# Altium PCB Peak Detector With Banking.PcbDoc (part 3 of 5)
Units mil, origin at the board's own origin, x right, y up, seen from the top; angles counter-clockwise.
Board outline 3330 x 2725 mil, 4 copper layers (TopLayer, GROUND, MidLayer1, BottomLayer); 549 components, 391 nets, 1594 pads, 460 vias.
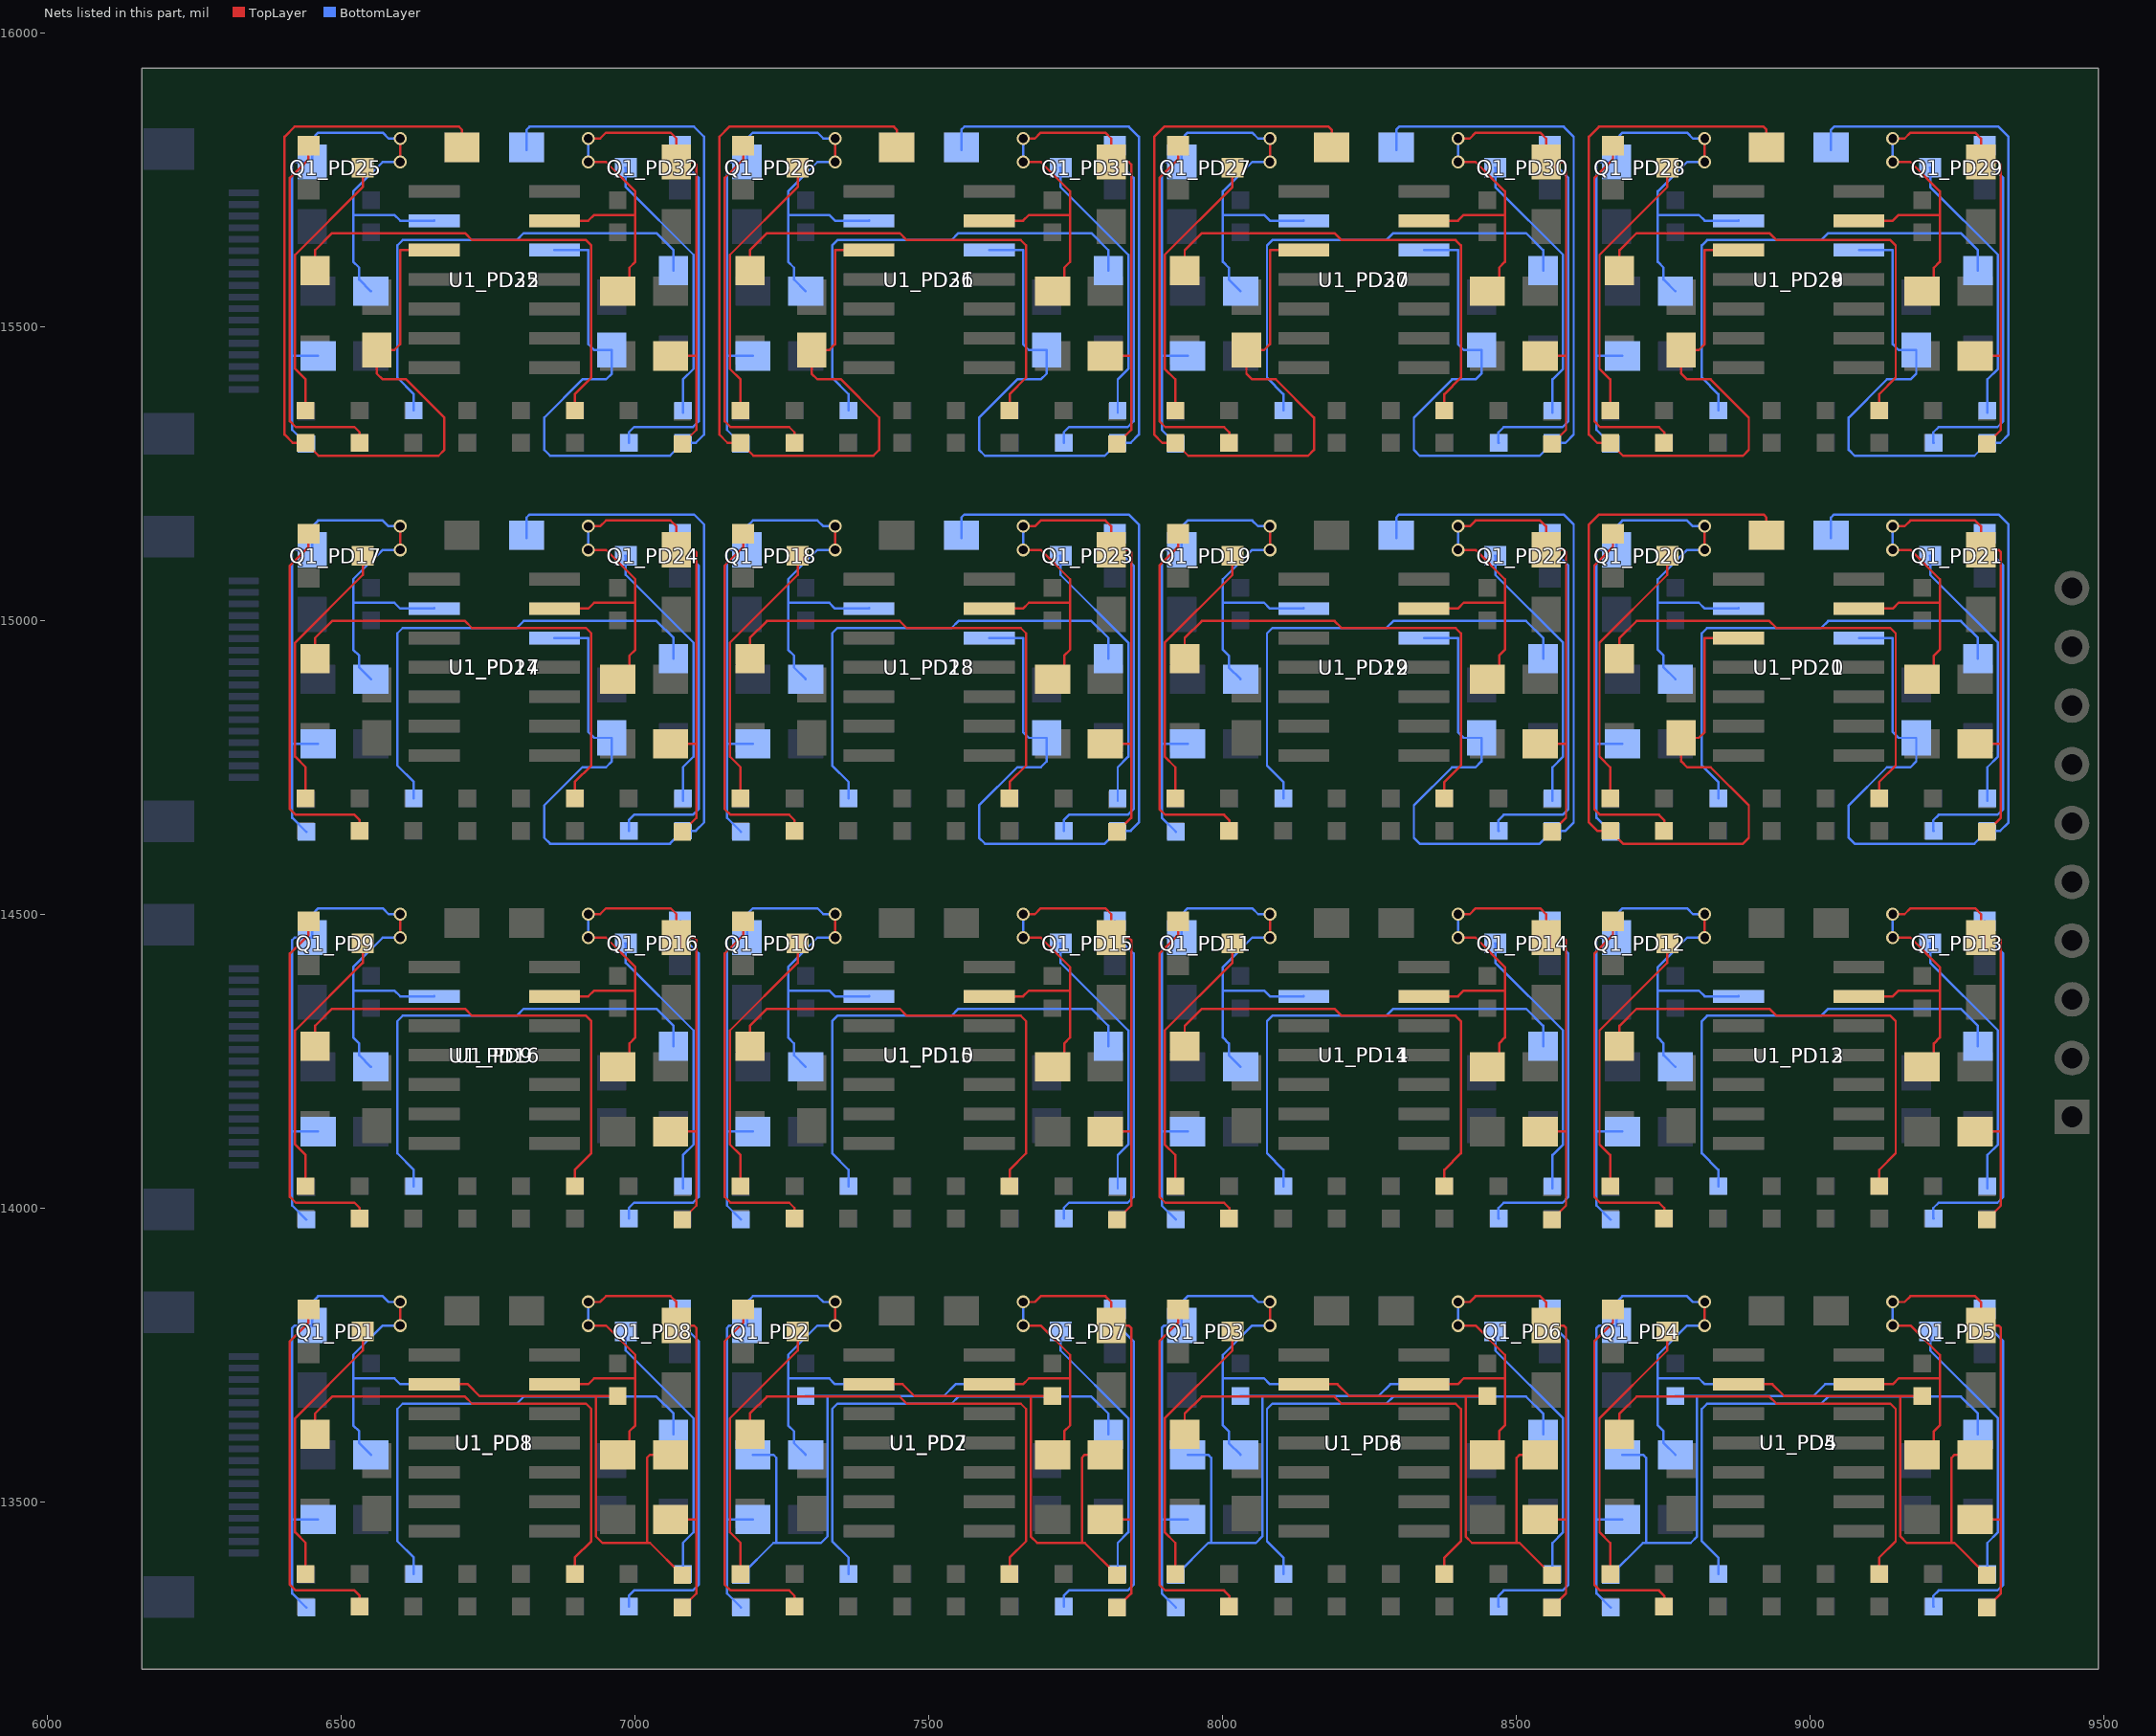
[diagram p5: the nets of this part, all layers, seen from the top]

## Via types
v1: diameter 22, hole 15, TopLayer to BottomLayer, 432 vias
v2: diameter 22, hole 16, TopLayer to BottomLayer, 28 vias

## Nets (pads, with @x,y where several pads share a name; then routed paths per layer and width w, separated by ;. In a path a pad name is that pad's centre, name@x,y a point inside that pad or via, vN(x,y) a via of type N, cw(c..) or ccw(c..) an arc to the next point about the centre after c; other vN are vias at no path point) (continued)
N6_PD20: C6_PD20.2 D1_PD20.2 R5_PD20.1 U1_PD20.10 | length 1647
  TopLayer w4: U1_PD20.10@8877.63,14970 8820,14970 8820,14810 8810,14800 C6_PD20.2@8780,14799.99 8780,14760 8790,14750 8830,14750 8895,14685 8895,14630 8885,14620 8681,14620 R5_PD20.1@8659,14642 8637,14642 8623,14656 8623,15163 8640,15180 8920,15180 8925.01,15174.99 D1_PD20.2@8925.01,15145 D1_PD20.2@8925.01,15140
N6_PD21: C6_PD21.2 D1_PD21.2 R5_PD21.1 U1_PD21.10 | length 1647
  BottomLayer w4: D1_PD21.2@9034.99,15140 D1_PD21.2@9034.99,15145 9034.99,15174.99 9040,15180 9320,15180 9337,15163 9337,14656 9323,14642 R5_PD21.1@9301,14642 9279,14620 9075,14620 9065,14630 9065,14685 9130,14750 9170,14750 9180,14760 C6_PD21.2@9180,14799.99 9150,14800 9140,14810 9140,14970 U1_PD21.10@9082.37,14970
N6_PD22: C6_PD22.2 D1_PD22.2 R5_PD22.1 U1_PD22.10 | length 1647
  BottomLayer w4: D1_PD22.2@8294.99,15140 D1_PD22.2@8294.99,15145 8294.99,15174.99 8300,15180 8580,15180 8597,15163 8597,14656 8583,14642 R5_PD22.1@8561,14642 8539,14620 8335,14620 8325,14630 8325,14685 8390,14750 8430,14750 8440,14760 C6_PD22.2@8440,14799.99 8410,14800 8400,14810 8400,14970 U1_PD22.10@8342.37,14970
N6_PD23: C6_PD23.2 D1_PD23.2 R5_PD23.1 U1_PD23.10 | length 1647
  BottomLayer w4: D1_PD23.2@7554.99,15140 D1_PD23.2@7554.99,15145 7554.99,15174.99 7560,15180 7840,15180 7857,15163 7857,14656 7843,14642 R5_PD23.1@7821,14642 7799,14620 7595,14620 7585,14630 7585,14685 7650,14750 7690,14750 7700,14760 C6_PD23.2@7700,14799.99 7670,14800 7660,14810 7660,14970 U1_PD23.10@7602.37,14970
N6_PD24: C6_PD24.2 D1_PD24.2 R5_PD24.1 U1_PD24.10 | length 1647
  BottomLayer w4: D1_PD24.2@6814.99,15140 D1_PD24.2@6814.99,15145 6814.99,15174.99 6820,15180 7100,15180 7117,15163 7117,14656 7103,14642 R5_PD24.1@7081,14642 7059,14620 6855,14620 6845,14630 6845,14685 6910,14750 6950,14750 6960,14760 C6_PD24.2@6960,14799.99 6930,14800 6920,14810 6920,14970 U1_PD24.10@6862.37,14970
N6_PD25: C6_PD25.2 D1_PD25.2 R5_PD25.1 U1_PD25.10 | length 1647
  TopLayer w4: U1_PD25.10@6657.63,15630 6600,15630 6600,15470 6590,15460 C6_PD25.2@6560,15459.99 6560,15420 6570,15410 6610,15410 6675,15345 6675,15290 6665,15280 6461,15280 R5_PD25.1@6439,15302 6417,15302 6403,15316 6403,15823 6420,15840 6700,15840 6705.01,15834.99 D1_PD25.2@6705.01,15805 D1_PD25.2@6705.01,15800
N6_PD26: C6_PD26.2 D1_PD26.2 R5_PD26.1 U1_PD26.10 | length 1647
  TopLayer w4: U1_PD26.10@7397.63,15630 7340,15630 7340,15470 7330,15460 C6_PD26.2@7300,15459.99 7300,15420 7310,15410 7350,15410 7415,15345 7415,15290 7405,15280 7201,15280 R5_PD26.1@7179,15302 7157,15302 7143,15316 7143,15823 7160,15840 7440,15840 7445.01,15834.99 D1_PD26.2@7445.01,15805 D1_PD26.2@7445.01,15800
N6_PD27: C6_PD27.2 D1_PD27.2 R5_PD27.1 U1_PD27.10 | length 1647
  TopLayer w4: U1_PD27.10@8137.63,15630 8080,15630 8080,15470 8070,15460 C6_PD27.2@8040,15459.99 8040,15420 8050,15410 8090,15410 8155,15345 8155,15290 8145,15280 7941,15280 R5_PD27.1@7919,15302 7897,15302 7883,15316 7883,15823 7900,15840 8180,15840 8185.01,15834.99 D1_PD27.2@8185.01,15805 D1_PD27.2@8185.01,15800
N6_PD28: C6_PD28.2 D1_PD28.2 R5_PD28.1 U1_PD28.10 | length 1647
  TopLayer w4: U1_PD28.10@8877.63,15630 8820,15630 8820,15470 8810,15460 C6_PD28.2@8780,15459.99 8780,15420 8790,15410 8830,15410 8895,15345 8895,15290 8885,15280 8681,15280 R5_PD28.1@8659,15302 8637,15302 8623,15316 8623,15823 8640,15840 8920,15840 8925.01,15834.99 D1_PD28.2@8925.01,15805 D1_PD28.2@8925.01,15800
N6_PD29: C6_PD29.2 D1_PD29.2 R5_PD29.1 U1_PD29.10 | length 1647
  BottomLayer w4: D1_PD29.2@9034.99,15800 D1_PD29.2@9034.99,15805 9034.99,15834.99 9040,15840 9320,15840 9337,15823 9337,15316 9323,15302 R5_PD29.1@9301,15302 9279,15280 9075,15280 9065,15290 9065,15345 9130,15410 9170,15410 9180,15420 C6_PD29.2@9180,15459.99 9150,15460 9140,15470 9140,15630 U1_PD29.10@9082.37,15630
N6_PD30: C6_PD30.2 D1_PD30.2 R5_PD30.1 U1_PD30.10 | length 1647
  BottomLayer w4: D1_PD30.2@8294.99,15800 D1_PD30.2@8294.99,15805 8294.99,15834.99 8300,15840 8580,15840 8597,15823 8597,15316 8583,15302 R5_PD30.1@8561,15302 8539,15280 8335,15280 8325,15290 8325,15345 8390,15410 8430,15410 8440,15420 C6_PD30.2@8440,15459.99 8410,15460 8400,15470 8400,15630 U1_PD30.10@8342.37,15630
N6_PD31: C6_PD31.2 D1_PD31.2 R5_PD31.1 U1_PD31.10 | length 1647
  BottomLayer w4: D1_PD31.2@7554.99,15800 D1_PD31.2@7554.99,15805 7554.99,15834.99 7560,15840 7840,15840 7857,15823 7857,15316 7843,15302 R5_PD31.1@7821,15302 7799,15280 7595,15280 7585,15290 7585,15345 7650,15410 7690,15410 7700,15420 C6_PD31.2@7700,15459.99 7670,15460 7660,15470 7660,15630 U1_PD31.10@7602.37,15630
N6_PD32: C6_PD32.2 D1_PD32.2 R5_PD32.1 U1_PD32.10 | length 1647
  BottomLayer w4: D1_PD32.2@6814.99,15800 D1_PD32.2@6814.99,15805 6814.99,15834.99 6820,15840 7100,15840 7117,15823 7117,15316 7103,15302 R5_PD32.1@7081,15302 7059,15280 6855,15280 6845,15290 6845,15345 6910,15410 6950,15410 6960,15420 C6_PD32.2@6960,15459.99 6930,15460 6920,15470 6920,15630 U1_PD32.10@6862.37,15630
N7_PD1: Q1_PD1.2 R4_PD1.2 | length 626.9
  TopLayer w4: Q1_PD1.2@6443.74,13827.4 6443.74,13804.74 6412,13773 6412,13359 6422,13349 6522,13349 6531,13340 6531,13321.99 R4_PD1.2@6530.57,13321.99
N7_PD2: Q1_PD2.2 R4_PD2.2 | length 626.9
  TopLayer w4: Q1_PD2.2@7183.74,13827.4 7183.74,13804.74 7152,13773 7152,13359 7162,13349 7262,13349 7271,13340 7271,13321.99 R4_PD2.2@7270.57,13321.99
N7_PD3: Q1_PD3.2 R4_PD3.2 | length 626.9
  TopLayer w4: Q1_PD3.2@7923.74,13827.4 7923.74,13804.74 7892,13773 7892,13359 7902,13349 8002,13349 8011,13340 8011,13321.99 R4_PD3.2@8010.57,13321.99
N7_PD4: Q1_PD4.2 R4_PD4.2 | length 626.9
  TopLayer w4: Q1_PD4.2@8663.74,13827.4 8663.74,13804.74 8632,13773 8632,13359 8642,13349 8742,13349 8751,13340 8751,13321.99 R4_PD4.2@8750.57,13321.99
N7_PD5: Q1_PD5.2 R4_PD5.2 | length 626.9
  BottomLayer w4: R4_PD5.2@9209.43,13321.99 9209,13321.99 9209,13340 9218,13349 9318,13349 9328,13359 9328,13773 9296.26,13804.74 Q1_PD5.2@9296.26,13827.4
N7_PD6: Q1_PD6.2 R4_PD6.2 | length 626.9
  BottomLayer w4: R4_PD6.2@8469.43,13321.99 8469,13321.99 8469,13340 8478,13349 8578,13349 8588,13359 8588,13773 8556.26,13804.74 Q1_PD6.2@8556.26,13827.4
N7_PD7: Q1_PD7.2 R4_PD7.2 | length 626.9
  BottomLayer w4: R4_PD7.2@7729.43,13321.99 7729,13321.99 7729,13340 7738,13349 7838,13349 7848,13359 7848,13773 7816.26,13804.74 Q1_PD7.2@7816.26,13827.4
N7_PD8: Q1_PD8.2 R4_PD8.2 | length 626.9
  BottomLayer w4: R4_PD8.2@6989.43,13321.99 6989,13321.99 6989,13340 6998,13349 7098,13349 7108,13359 7108,13773 7076.26,13804.74 Q1_PD8.2@7076.26,13827.4
N7_PD9: Q1_PD9.2 R4_PD9.2 | length 626.9
  TopLayer w4: Q1_PD9.2@6443.74,14487.4 6443.74,14464.74 6412,14433 6412,14019 6422,14009 6522,14009 6531,14000 6531,13981.99 R4_PD9.2@6530.57,13981.99
N7_PD10: Q1_PD10.2 R4_PD10.2 | length 626.9
  TopLayer w4: Q1_PD10.2@7183.74,14487.4 7183.74,14464.74 7152,14433 7152,14019 7162,14009 7262,14009 7271,14000 7271,13981.99 R4_PD10.2@7270.57,13981.99
N7_PD11: Q1_PD11.2 R4_PD11.2 | length 626.9
  TopLayer w4: Q1_PD11.2@7923.74,14487.4 7923.74,14464.74 7892,14433 7892,14019 7902,14009 8002,14009 8011,14000 8011,13981.99 R4_PD11.2@8010.57,13981.99
N7_PD12: Q1_PD12.2 R4_PD12.2 | length 626.9
  TopLayer w4: Q1_PD12.2@8663.74,14487.4 8663.74,14464.74 8632,14433 8632,14019 8642,14009 8742,14009 8751,14000 8751,13981.99 R4_PD12.2@8750.57,13981.99
N7_PD13: Q1_PD13.2 R4_PD13.2 | length 626.9
  BottomLayer w4: R4_PD13.2@9209.43,13981.99 9209,13981.99 9209,14000 9218,14009 9318,14009 9328,14019 9328,14433 9296.26,14464.74 Q1_PD13.2@9296.26,14487.4
N7_PD14: Q1_PD14.2 R4_PD14.2 | length 626.9
  BottomLayer w4: R4_PD14.2@8469.43,13981.99 8469,13981.99 8469,14000 8478,14009 8578,14009 8588,14019 8588,14433 8556.26,14464.74 Q1_PD14.2@8556.26,14487.4
N7_PD15: Q1_PD15.2 R4_PD15.2 | length 626.9
  BottomLayer w4: R4_PD15.2@7729.43,13981.99 7729,13981.99 7729,14000 7738,14009 7838,14009 7848,14019 7848,14433 7816.26,14464.74 Q1_PD15.2@7816.26,14487.4
N7_PD16: Q1_PD16.2 R4_PD16.2 | length 626.9
  BottomLayer w4: R4_PD16.2@6989.43,13981.99 6989,13981.99 6989,14000 6998,14009 7098,14009 7108,14019 7108,14433 7076.26,14464.74 Q1_PD16.2@7076.26,14487.4
N7_PD17: Q1_PD17.2 R4_PD17.2 | length 626.9
  TopLayer w4: Q1_PD17.2@6443.74,15147.4 6443.74,15124.74 6412,15093 6412,14679 6422,14669 6522,14669 6531,14660 6531,14641.99 R4_PD17.2@6530.57,14641.99
N7_PD18: Q1_PD18.2 R4_PD18.2 | length 626.9
  TopLayer w4: Q1_PD18.2@7183.74,15147.4 7183.74,15124.74 7152,15093 7152,14679 7162,14669 7262,14669 7271,14660 7271,14641.99 R4_PD18.2@7270.57,14641.99
N7_PD19: Q1_PD19.2 R4_PD19.2 | length 626.9
  TopLayer w4: Q1_PD19.2@7923.74,15147.4 7923.74,15124.74 7892,15093 7892,14679 7902,14669 8002,14669 8011,14660 8011,14641.99 R4_PD19.2@8010.57,14641.99
N7_PD20: Q1_PD20.2 R4_PD20.2 | length 626.9
  TopLayer w4: Q1_PD20.2@8663.74,15147.4 8663.74,15124.74 8632,15093 8632,14679 8642,14669 8742,14669 8751,14660 8751,14641.99 R4_PD20.2@8750.57,14641.99
N7_PD21: Q1_PD21.2 R4_PD21.2 | length 626.9
  BottomLayer w4: R4_PD21.2@9209.43,14641.99 9209,14641.99 9209,14660 9218,14669 9318,14669 9328,14679 9328,15093 9296.26,15124.74 Q1_PD21.2@9296.26,15147.4
N7_PD22: Q1_PD22.2 R4_PD22.2 | length 626.9
  BottomLayer w4: R4_PD22.2@8469.43,14641.99 8469,14641.99 8469,14660 8478,14669 8578,14669 8588,14679 8588,15093 8556.26,15124.74 Q1_PD22.2@8556.26,15147.4
N7_PD23: Q1_PD23.2 R4_PD23.2 | length 626.9
  BottomLayer w4: R4_PD23.2@7729.43,14641.99 7729,14641.99 7729,14660 7738,14669 7838,14669 7848,14679 7848,15093 7816.26,15124.74 Q1_PD23.2@7816.26,15147.4
N7_PD24: Q1_PD24.2 R4_PD24.2 | length 626.9
  BottomLayer w4: R4_PD24.2@6989.43,14641.99 6989,14641.99 6989,14660 6998,14669 7098,14669 7108,14679 7108,15093 7076.26,15124.74 Q1_PD24.2@7076.26,15147.4
N7_PD25: Q1_PD25.2 R4_PD25.2 | length 626.9
  TopLayer w4: Q1_PD25.2@6443.74,15807.4 6443.74,15784.74 6412,15753 6412,15339 6422,15329 6522,15329 6531,15320 6531,15301.99 R4_PD25.2@6530.57,15301.99
N7_PD26: Q1_PD26.2 R4_PD26.2 | length 626.9
  TopLayer w4: Q1_PD26.2@7183.74,15807.4 7183.74,15784.74 7152,15753 7152,15339 7162,15329 7262,15329 7271,15320 7271,15301.99 R4_PD26.2@7270.57,15301.99
N7_PD27: Q1_PD27.2 R4_PD27.2 | length 626.9
  TopLayer w4: Q1_PD27.2@7923.74,15807.4 7923.74,15784.74 7892,15753 7892,15339 7902,15329 8002,15329 8011,15320 8011,15301.99 R4_PD27.2@8010.57,15301.99
N7_PD28: Q1_PD28.2 R4_PD28.2 | length 626.9
  TopLayer w4: Q1_PD28.2@8663.74,15807.4 8663.74,15784.74 8632,15753 8632,15339 8642,15329 8742,15329 8751,15320 8751,15301.99 R4_PD28.2@8750.57,15301.99
N7_PD29: Q1_PD29.2 R4_PD29.2 | length 626.9
  BottomLayer w4: R4_PD29.2@9209.43,15301.99 9209,15301.99 9209,15320 9218,15329 9318,15329 9328,15339 9328,15753 9296.26,15784.74 Q1_PD29.2@9296.26,15807.4
N7_PD30: Q1_PD30.2 R4_PD30.2 | length 626.9
  BottomLayer w4: R4_PD30.2@8469.43,15301.99 8469,15301.99 8469,15320 8478,15329 8578,15329 8588,15339 8588,15753 8556.26,15784.74 Q1_PD30.2@8556.26,15807.4
N7_PD31: Q1_PD31.2 R4_PD31.2 | length 626.9
  BottomLayer w4: R4_PD31.2@7729.43,15301.99 7729,15301.99 7729,15320 7738,15329 7838,15329 7848,15339 7848,15753 7816.26,15784.74 Q1_PD31.2@7816.26,15807.4
N7_PD32: Q1_PD32.2 R4_PD32.2 | length 626.9
  BottomLayer w4: R4_PD32.2@6989.43,15301.99 6989,15301.99 6989,15320 6998,15329 7098,15329 7108,15339 7108,15753 7076.26,15784.74 Q1_PD32.2@7076.26,15807.4
N8_PD1: Q1_PD1.1 R5_PD1.2 | length 472.9
  TopLayer w4: R5_PD1.2@6439,13373 R5_PD1.2@6439,13377 6439,13430 6421,13448 6421,13642 6536.26,13757.26 Q1_PD1.1@6536.26,13790 Q1_PD1.1@6537,13790
N8_PD2: Q1_PD2.1 R5_PD2.2 | length 472.9
  TopLayer w4: R5_PD2.2@7179,13373 R5_PD2.2@7179,13377 7179,13430 7161,13448 7161,13642 7276.26,13757.26 Q1_PD2.1@7276.26,13790 Q1_PD2.1@7277,13790
N8_PD3: Q1_PD3.1 R5_PD3.2 | length 472.9
  TopLayer w4: R5_PD3.2@7919,13373 R5_PD3.2@7919,13377 7919,13430 7901,13448 7901,13642 8016.26,13757.26 Q1_PD3.1@8016.26,13790 Q1_PD3.1@8017,13790
N8_PD4: Q1_PD4.1 R5_PD4.2 | length 472.9
  TopLayer w4: R5_PD4.2@8659,13373 R5_PD4.2@8659,13377 8659,13430 8641,13448 8641,13642 8756.26,13757.26 Q1_PD4.1@8756.26,13790 Q1_PD4.1@8757,13790
N8_PD5: Q1_PD5.1 R5_PD5.2 | length 472.9
  BottomLayer w4: Q1_PD5.1@9203,13790 Q1_PD5.1@9203.74,13790 9203.74,13757.26 9319,13642 9319,13448 9301,13430 R5_PD5.2@9301,13377 R5_PD5.2@9301,13373
N8_PD6: Q1_PD6.1 R5_PD6.2 | length 472.9
  BottomLayer w4: Q1_PD6.1@8463,13790 Q1_PD6.1@8463.74,13790 8463.74,13757.26 8579,13642 8579,13448 8561,13430 R5_PD6.2@8561,13377 R5_PD6.2@8561,13373
N8_PD7: Q1_PD7.1 R5_PD7.2 | length 472.9
  BottomLayer w4: Q1_PD7.1@7723,13790 Q1_PD7.1@7723.74,13790 7723.74,13757.26 7839,13642 7839,13448 7821,13430 R5_PD7.2@7821,13377 R5_PD7.2@7821,13373
N8_PD8: Q1_PD8.1 R5_PD8.2 | length 472.9
  BottomLayer w4: Q1_PD8.1@6983,13790 Q1_PD8.1@6983.74,13790 6983.74,13757.26 7099,13642 7099,13448 7081,13430 R5_PD8.2@7081,13377 R5_PD8.2@7081,13373
N8_PD9: Q1_PD9.1 R5_PD9.2 | length 472.9
  TopLayer w4: R5_PD9.2@6439,14033 R5_PD9.2@6439,14037 6439,14090 6421,14108 6421,14302 6536.26,14417.26 Q1_PD9.1@6536.26,14450 Q1_PD9.1@6537,14450
N8_PD10: Q1_PD10.1 R5_PD10.2 | length 472.9
  TopLayer w4: R5_PD10.2@7179,14033 R5_PD10.2@7179,14037 7179,14090 7161,14108 7161,14302 7276.26,14417.26 Q1_PD10.1@7276.26,14450 Q1_PD10.1@7277,14450
N8_PD11: Q1_PD11.1 R5_PD11.2 | length 472.9
  TopLayer w4: R5_PD11.2@7919,14033 R5_PD11.2@7919,14037 7919,14090 7901,14108 7901,14302 8016.26,14417.26 Q1_PD11.1@8016.26,14450 Q1_PD11.1@8017,14450
N8_PD12: Q1_PD12.1 R5_PD12.2 | length 472.9
  TopLayer w4: R5_PD12.2@8659,14033 R5_PD12.2@8659,14037 8659,14090 8641,14108 8641,14302 8756.26,14417.26 Q1_PD12.1@8756.26,14450 Q1_PD12.1@8757,14450
N8_PD13: Q1_PD13.1 R5_PD13.2 | length 472.9
  BottomLayer w4: Q1_PD13.1@9203,14450 Q1_PD13.1@9203.74,14450 9203.74,14417.26 9319,14302 9319,14108 9301,14090 R5_PD13.2@9301,14037 R5_PD13.2@9301,14033
N8_PD14: Q1_PD14.1 R5_PD14.2 | length 472.9
  BottomLayer w4: Q1_PD14.1@8463,14450 Q1_PD14.1@8463.74,14450 8463.74,14417.26 8579,14302 8579,14108 8561,14090 R5_PD14.2@8561,14037 R5_PD14.2@8561,14033
N8_PD15: Q1_PD15.1 R5_PD15.2 | length 472.9
  BottomLayer w4: Q1_PD15.1@7723,14450 Q1_PD15.1@7723.74,14450 7723.74,14417.26 7839,14302 7839,14108 7821,14090 R5_PD15.2@7821,14037 R5_PD15.2@7821,14033
N8_PD16: Q1_PD16.1 R5_PD16.2 | length 472.9
  BottomLayer w4: Q1_PD16.1@6983,14450 Q1_PD16.1@6983.74,14450 6983.74,14417.26 7099,14302 7099,14108 7081,14090 R5_PD16.2@7081,14037 R5_PD16.2@7081,14033
N8_PD17: Q1_PD17.1 R5_PD17.2 | length 472.9
  TopLayer w4: R5_PD17.2@6439,14693 R5_PD17.2@6439,14697 6439,14750 6421,14768 6421,14962 6536.26,15077.26 Q1_PD17.1@6536.26,15110 Q1_PD17.1@6537,15110
N8_PD18: Q1_PD18.1 R5_PD18.2 | length 472.9
  TopLayer w4: R5_PD18.2@7179,14693 R5_PD18.2@7179,14697 7179,14750 7161,14768 7161,14962 7276.26,15077.26 Q1_PD18.1@7276.26,15110 Q1_PD18.1@7277,15110
N8_PD19: Q1_PD19.1 R5_PD19.2 | length 472.9
  TopLayer w4: R5_PD19.2@7919,14693 R5_PD19.2@7919,14697 7919,14750 7901,14768 7901,14962 8016.26,15077.26 Q1_PD19.1@8016.26,15110 Q1_PD19.1@8017,15110
N8_PD20: Q1_PD20.1 R5_PD20.2 | length 472.9
  TopLayer w4: R5_PD20.2@8659,14693 R5_PD20.2@8659,14697 8659,14750 8641,14768 8641,14962 8756.26,15077.26 Q1_PD20.1@8756.26,15110 Q1_PD20.1@8757,15110
N8_PD21: Q1_PD21.1 R5_PD21.2 | length 472.9
  BottomLayer w4: Q1_PD21.1@9203,15110 Q1_PD21.1@9203.74,15110 9203.74,15077.26 9319,14962 9319,14768 9301,14750 R5_PD21.2@9301,14697 R5_PD21.2@9301,14693
N8_PD22: Q1_PD22.1 R5_PD22.2 | length 472.9
  BottomLayer w4: Q1_PD22.1@8463,15110 Q1_PD22.1@8463.74,15110 8463.74,15077.26 8579,14962 8579,14768 8561,14750 R5_PD22.2@8561,14697 R5_PD22.2@8561,14693
N8_PD23: Q1_PD23.1 R5_PD23.2 | length 472.9
  BottomLayer w4: Q1_PD23.1@7723,15110 Q1_PD23.1@7723.74,15110 7723.74,15077.26 7839,14962 7839,14768 7821,14750 R5_PD23.2@7821,14697 R5_PD23.2@7821,14693
N8_PD24: Q1_PD24.1 R5_PD24.2 | length 472.9
  BottomLayer w4: Q1_PD24.1@6983,15110 Q1_PD24.1@6983.74,15110 6983.74,15077.26 7099,14962 7099,14768 7081,14750 R5_PD24.2@7081,14697 R5_PD24.2@7081,14693
N8_PD25: Q1_PD25.1 R5_PD25.2 | length 472.9
  TopLayer w4: R5_PD25.2@6439,15353 R5_PD25.2@6439,15357 6439,15410 6421,15428 6421,15622 6536.26,15737.26 Q1_PD25.1@6536.26,15770 Q1_PD25.1@6537,15770
N8_PD26: Q1_PD26.1 R5_PD26.2 | length 472.9
  TopLayer w4: R5_PD26.2@7179,15353 R5_PD26.2@7179,15357 7179,15410 7161,15428 7161,15622 7276.26,15737.26 Q1_PD26.1@7276.26,15770 Q1_PD26.1@7277,15770
N8_PD27: Q1_PD27.1 R5_PD27.2 | length 472.9
  TopLayer w4: R5_PD27.2@7919,15353 R5_PD27.2@7919,15357 7919,15410 7901,15428 7901,15622 8016.26,15737.26 Q1_PD27.1@8016.26,15770 Q1_PD27.1@8017,15770
N8_PD28: Q1_PD28.1 R5_PD28.2 | length 472.9
  TopLayer w4: R5_PD28.2@8659,15353 R5_PD28.2@8659,15357 8659,15410 8641,15428 8641,15622 8756.26,15737.26 Q1_PD28.1@8756.26,15770 Q1_PD28.1@8757,15770
N8_PD29: Q1_PD29.1 R5_PD29.2 | length 472.9
  BottomLayer w4: Q1_PD29.1@9203,15770 Q1_PD29.1@9203.74,15770 9203.74,15737.26 9319,15622 9319,15428 9301,15410 R5_PD29.2@9301,15357 R5_PD29.2@9301,15353
N8_PD30: Q1_PD30.1 R5_PD30.2 | length 472.9
  BottomLayer w4: Q1_PD30.1@8463,15770 Q1_PD30.1@8463.74,15770 8463.74,15737.26 8579,15622 8579,15428 8561,15410 R5_PD30.2@8561,15357 R5_PD30.2@8561,15353
N8_PD31: Q1_PD31.1 R5_PD31.2 | length 472.9
  BottomLayer w4: Q1_PD31.1@7723,15770 Q1_PD31.1@7723.74,15770 7723.74,15737.26 7839,15622 7839,15428 7821,15410 R5_PD31.2@7821,15357 R5_PD31.2@7821,15353
N8_PD32: Q1_PD32.1 R5_PD32.2 | length 472.9
  BottomLayer w4: Q1_PD32.1@6983,15770 Q1_PD32.1@6983.74,15770 6983.74,15737.26 7099,15622 7099,15428 7081,15410 R5_PD32.2@7081,15357 R5_PD32.2@7081,15353
NetC1_PD1_1: C1_PD1.1 R1_PD1.1 | length 818.5
  TopLayer w4: C1_PD1.1@6455,13615 6455,13650 6484,13679 6710,13679 6722,13667 6916,13667 6925,13658 6925,13433 6897,13405 6897,13376.99 R1_PD1.1@6896.86,13376.99
NetC1_PD2_1: C1_PD2.1 R1_PD2.1 | length 818.5
  TopLayer w4: C1_PD2.1@7195,13615 7195,13650 7224,13679 7450,13679 7462,13667 7656,13667 7665,13658 7665,13433 7637,13405 7637,13376.99 R1_PD2.1@7636.86,13376.99
NetC1_PD3_1: C1_PD3.1 R1_PD3.1 | length 818.5
  TopLayer w4: C1_PD3.1@7935,13615 7935,13650 7964,13679 8190,13679 8202,13667 8396,13667 8405,13658 8405,13433 8377,13405 8377,13376.99 R1_PD3.1@8376.86,13376.99
NetC1_PD4_1: C1_PD4.1 R1_PD4.1 | length 818.5
  TopLayer w4: C1_PD4.1@8675,13615 8675,13650 8704,13679 8930,13679 8942,13667 9136,13667 9145,13658 9145,13433 9117,13405 9117,13376.99 R1_PD4.1@9116.86,13376.99
NetC1_PD5_1: C1_PD5.1 R1_PD5.1 | length 818.5
  BottomLayer w4: R1_PD5.1@8843.14,13376.99 8843,13376.99 8843,13405 8815,13433 8815,13658 8824,13667 9018,13667 9030,13679 9256,13679 9285,13650 C1_PD5.1@9285,13615
NetC1_PD6_1: C1_PD6.1 R1_PD6.1 | length 818.5
  BottomLayer w4: R1_PD6.1@8103.14,13376.99 8103,13376.99 8103,13405 8075,13433 8075,13658 8084,13667 8278,13667 8290,13679 8516,13679 8545,13650 C1_PD6.1@8545,13615
NetC1_PD7_1: C1_PD7.1 R1_PD7.1 | length 818.5
  BottomLayer w4: R1_PD7.1@7363.14,13376.99 7363,13376.99 7363,13405 7335,13433 7335,13658 7344,13667 7538,13667 7550,13679 7776,13679 7805,13650 C1_PD7.1@7805,13615
NetC1_PD8_1: C1_PD8.1 R1_PD8.1 | length 818.5
  BottomLayer w4: R1_PD8.1@6623.14,13376.99 6623,13376.99 6623,13405 6595,13433 6595,13658 6604,13667 6798,13667 6810,13679 7036,13679 7065,13650 C1_PD8.1@7065,13615
NetC1_PD9_1: C1_PD9.1 R1_PD9.1 | length 818.5
  TopLayer w4: C1_PD9.1@6455,14275 6455,14310 6484,14339 6710,14339 6722,14327 6916,14327 6925,14318 6925,14093 6897,14065 6897,14036.99 R1_PD9.1@6896.86,14036.99
NetC1_PD10_1: C1_PD10.1 R1_PD10.1 | length 818.5
  TopLayer w4: C1_PD10.1@7195,14275 7195,14310 7224,14339 7450,14339 7462,14327 7656,14327 7665,14318 7665,14093 7637,14065 7637,14036.99 R1_PD10.1@7636.86,14036.99
NetC1_PD11_1: C1_PD11.1 R1_PD11.1 | length 818.5
  TopLayer w4: C1_PD11.1@7935,14275 7935,14310 7964,14339 8190,14339 8202,14327 8396,14327 8405,14318 8405,14093 8377,14065 8377,14036.99 R1_PD11.1@8376.86,14036.99
NetC1_PD12_1: C1_PD12.1 R1_PD12.1 | length 818.5
  TopLayer w4: C1_PD12.1@8675,14275 8675,14310 8704,14339 8930,14339 8942,14327 9136,14327 9145,14318 9145,14093 9117,14065 9117,14036.99 R1_PD12.1@9116.86,14036.99
NetC1_PD13_1: C1_PD13.1 R1_PD13.1 | length 818.5
  BottomLayer w4: R1_PD13.1@8843.14,14036.99 8843,14036.99 8843,14065 8815,14093 8815,14318 8824,14327 9018,14327 9030,14339 9256,14339 9285,14310 C1_PD13.1@9285,14275
NetC1_PD14_1: C1_PD14.1 R1_PD14.1 | length 818.5
  BottomLayer w4: R1_PD14.1@8103.14,14036.99 8103,14036.99 8103,14065 8075,14093 8075,14318 8084,14327 8278,14327 8290,14339 8516,14339 8545,14310 C1_PD14.1@8545,14275
NetC1_PD15_1: C1_PD15.1 R1_PD15.1 | length 818.5
  BottomLayer w4: R1_PD15.1@7363.14,14036.99 7363,14036.99 7363,14065 7335,14093 7335,14318 7344,14327 7538,14327 7550,14339 7776,14339 7805,14310 C1_PD15.1@7805,14275
NetC1_PD16_1: C1_PD16.1 R1_PD16.1 | length 818.5
  BottomLayer w4: R1_PD16.1@6623.14,14036.99 6623,14036.99 6623,14065 6595,14093 6595,14318 6604,14327 6798,14327 6810,14339 7036,14339 7065,14310 C1_PD16.1@7065,14275
NetC1_PD17_1: C1_PD17.1 R1_PD17.1 | length 818.5
  TopLayer w4: C1_PD17.1@6455,14935 6455,14970 6484,14999 6710,14999 6722,14987 6916,14987 6925,14978 6925,14753 6897,14725 6897,14696.99 R1_PD17.1@6896.86,14696.99
NetC1_PD18_1: C1_PD18.1 R1_PD18.1 | length 818.5
  TopLayer w4: C1_PD18.1@7195,14935 7195,14970 7224,14999 7450,14999 7462,14987 7656,14987 7665,14978 7665,14753 7637,14725 7637,14696.99 R1_PD18.1@7636.86,14696.99
NetC1_PD19_1: C1_PD19.1 R1_PD19.1 | length 818.5
  TopLayer w4: C1_PD19.1@7935,14935 7935,14970 7964,14999 8190,14999 8202,14987 8396,14987 8405,14978 8405,14753 8377,14725 8377,14696.99 R1_PD19.1@8376.86,14696.99
NetC1_PD20_1: C1_PD20.1 R1_PD20.1 | length 818.5
  TopLayer w4: C1_PD20.1@8675,14935 8675,14970 8704,14999 8930,14999 8942,14987 9136,14987 9145,14978 9145,14753 9117,14725 9117,14696.99 R1_PD20.1@9116.86,14696.99
NetC1_PD21_1: C1_PD21.1 R1_PD21.1 | length 818.5
  BottomLayer w4: R1_PD21.1@8843.14,14696.99 8843,14696.99 8843,14725 8815,14753 8815,14978 8824,14987 9018,14987 9030,14999 9256,14999 9285,14970 C1_PD21.1@9285,14935
NetC1_PD22_1: C1_PD22.1 R1_PD22.1 | length 818.5
  BottomLayer w4: R1_PD22.1@8103.14,14696.99 8103,14696.99 8103,14725 8075,14753 8075,14978 8084,14987 8278,14987 8290,14999 8516,14999 8545,14970 C1_PD22.1@8545,14935
NetC1_PD23_1: C1_PD23.1 R1_PD23.1 | length 818.5
  BottomLayer w4: R1_PD23.1@7363.14,14696.99 7363,14696.99 7363,14725 7335,14753 7335,14978 7344,14987 7538,14987 7550,14999 7776,14999 7805,14970 C1_PD23.1@7805,14935
NetC1_PD24_1: C1_PD24.1 R1_PD24.1 | length 818.5
  BottomLayer w4: R1_PD24.1@6623.14,14696.99 6623,14696.99 6623,14725 6595,14753 6595,14978 6604,14987 6798,14987 6810,14999 7036,14999 7065,14970 C1_PD24.1@7065,14935
NetC1_PD25_1: C1_PD25.1 R1_PD25.1 | length 818.5
  TopLayer w4: C1_PD25.1@6455,15595 6455,15630 6484,15659 6710,15659 6722,15647 6916,15647 6925,15638 6925,15413 6897,15385 6897,15356.99 R1_PD25.1@6896.86,15356.99
NetC1_PD26_1: C1_PD26.1 R1_PD26.1 | length 818.5
  TopLayer w4: C1_PD26.1@7195,15595 7195,15630 7224,15659 7450,15659 7462,15647 7656,15647 7665,15638 7665,15413 7637,15385 7637,15356.99 R1_PD26.1@7636.86,15356.99
NetC1_PD27_1: C1_PD27.1 R1_PD27.1 | length 818.5
  TopLayer w4: C1_PD27.1@7935,15595 7935,15630 7964,15659 8190,15659 8202,15647 8396,15647 8405,15638 8405,15413 8377,15385 8377,15356.99 R1_PD27.1@8376.86,15356.99
NetC1_PD28_1: C1_PD28.1 R1_PD28.1 | length 818.5
  TopLayer w4: C1_PD28.1@8675,15595 8675,15630 8704,15659 8930,15659 8942,15647 9136,15647 9145,15638 9145,15413 9117,15385 9117,15356.99 R1_PD28.1@9116.86,15356.99
NetC1_PD29_1: C1_PD29.1 R1_PD29.1 | length 818.5
  BottomLayer w4: R1_PD29.1@8843.14,15356.99 8843,15356.99 8843,15385 8815,15413 8815,15638 8824,15647 9018,15647 9030,15659 9256,15659 9285,15630 C1_PD29.1@9285,15595
NetC1_PD30_1: C1_PD30.1 R1_PD30.1 | length 818.5
  BottomLayer w4: R1_PD30.1@8103.14,15356.99 8103,15356.99 8103,15385 8075,15413 8075,15638 8084,15647 8278,15647 8290,15659 8516,15659 8545,15630 C1_PD30.1@8545,15595
NetC1_PD31_1: C1_PD31.1 R1_PD31.1 | length 818.5
  BottomLayer w4: R1_PD31.1@7363.14,15356.99 7363,15356.99 7363,15385 7335,15413 7335,15638 7344,15647 7538,15647 7550,15659 7776,15659 7805,15630 C1_PD31.1@7805,15595
NetC1_PD32_1: C1_PD32.1 R1_PD32.1 | length 818.5
  BottomLayer w4: R1_PD32.1@6623.14,15356.99 6623,15356.99 6623,15385 6595,15413 6595,15638 6604,15647 6798,15647 6810,15659 7036,15659 7065,15630 C1_PD32.1@7065,15595
NetC4_PD1_1: C4_PD1.1 C5_PD1.1 D2_PD1.1 R8_PD1.1 U1_PD1.6 | length 1228.8
  TopLayer w4: U1_PD1.6@6862.35,13700 6920,13700 6930,13710 7000,13710 ; v1(6920,13800) 6950,13800 7000,13750 7000,13710 ; v1(6920,13840) 6940,13840 6950,13850 7060,13850 7070,13840 D2_PD1.1@7070,13800.01 7099.99,13800.01 7104,13796 7104,13788 7104,13470 ; C5_PD1.1@6970.01,13580 6990,13600 6990,13620 7000,13630 7000,13710 ; C4_PD1.1@7059.99,13470 7104,13470 ; R8_PD1.1@7080,13320 7104,13344 7104,13470
  BottomLayer w4: v1(6920,13800) v1(6920,13840)
NetC4_PD2_1: C4_PD2.1 C5_PD2.1 D2_PD2.1 R8_PD2.1 U1_PD2.6 | length 1228.8
  TopLayer w4: U1_PD2.6@7602.35,13700 7660,13700 7670,13710 7740,13710 ; v1(7660,13800) 7690,13800 7740,13750 7740,13710 ; v1(7660,13840) 7680,13840 7690,13850 7800,13850 7810,13840 D2_PD2.1@7810,13800.01 7839.99,13800.01 7844,13796 7844,13788 7844,13470 ; C5_PD2.1@7710.01,13580 7730,13600 7730,13620 7740,13630 7740,13710 ; C4_PD2.1@7799.99,13470 7844,13470 ; R8_PD2.1@7820,13320 7844,13344 7844,13470
  BottomLayer w4: v1(7660,13800) v1(7660,13840)
NetC4_PD3_1: C4_PD3.1 C5_PD3.1 D2_PD3.1 R8_PD3.1 U1_PD3.6 | length 1228.8
  TopLayer w4: U1_PD3.6@8342.35,13700 8400,13700 8410,13710 8480,13710 ; v1(8400,13800) 8430,13800 8480,13750 8480,13710 ; v1(8400,13840) 8420,13840 8430,13850 8540,13850 8550,13840 D2_PD3.1@8550,13800.01 8579.99,13800.01 8584,13796 8584,13788 8584,13470 ; C5_PD3.1@8450.01,13580 8470,13600 8470,13620 8480,13630 8480,13710 ; C4_PD3.1@8539.99,13470 8584,13470 ; R8_PD3.1@8560,13320 8584,13344 8584,13470
  BottomLayer w4: v1(8400,13800) v1(8400,13840)
NetC4_PD4_1: C4_PD4.1 C5_PD4.1 D2_PD4.1 R8_PD4.1 U1_PD4.6 | length 1228.8
  TopLayer w4: U1_PD4.6@9082.35,13700 9140,13700 9150,13710 9220,13710 ; v1(9140,13800) 9170,13800 9220,13750 9220,13710 ; v1(9140,13840) 9160,13840 9170,13850 9280,13850 9290,13840 D2_PD4.1@9290,13800.01 9319.99,13800.01 9324,13796 9324,13788 9324,13470 ; C5_PD4.1@9190.01,13580 9210,13600 9210,13620 9220,13630 9220,13710 ; C4_PD4.1@9279.99,13470 9324,13470 ; R8_PD4.1@9300,13320 9324,13344 9324,13470
  BottomLayer w4: v1(9140,13800) v1(9140,13840)
NetC4_PD5_1: C4_PD5.1 C5_PD5.1 D2_PD5.1 R8_PD5.1 U1_PD5.6 | length 1228.8
  TopLayer w4: v1(8820,13800) v1(8820,13840)
  BottomLayer w4: R8_PD5.1@8660,13320 8636,13344 8636,13470 ; C4_PD5.1@8680.01,13470 8636,13470 ; C5_PD5.1@8769.99,13580 8750,13600 8750,13620 8740,13630 8740,13710 ; v1(8820,13800) 8790,13800 8740,13750 8740,13710 ; v1(8820,13840) 8800,13840 8790,13850 8680,13850 8670,13840 D2_PD5.1@8670,13800.01 8640.01,13800.01 8636,13796 8636,13788 8636,13470 ; U1_PD5.6@8877.65,13700 8820,13700 8810,13710 8740,13710
NetC4_PD6_1: C4_PD6.1 C5_PD6.1 D2_PD6.1 R8_PD6.1 U1_PD6.6 | length 1228.8
  TopLayer w4: v1(8080,13800) v1(8080,13840)
  BottomLayer w4: R8_PD6.1@7920,13320 7896,13344 7896,13470 ; C4_PD6.1@7940.01,13470 7896,13470 ; C5_PD6.1@8029.99,13580 8010,13600 8010,13620 8000,13630 8000,13710 ; v1(8080,13800) 8050,13800 8000,13750 8000,13710 ; v1(8080,13840) 8060,13840 8050,13850 7940,13850 7930,13840 D2_PD6.1@7930,13800.01 7900.01,13800.01 7896,13796 7896,13788 7896,13470 ; U1_PD6.6@8137.65,13700 8080,13700 8070,13710 8000,13710
NetC4_PD7_1: C4_PD7.1 C5_PD7.1 D2_PD7.1 R8_PD7.1 U1_PD7.6 | length 1228.8
  TopLayer w4: v1(7340,13800) v1(7340,13840)
  BottomLayer w4: R8_PD7.1@7180,13320 7156,13344 7156,13470 ; C4_PD7.1@7200.01,13470 7156,13470 ; C5_PD7.1@7289.99,13580 7270,13600 7270,13620 7260,13630 7260,13710 ; v1(7340,13800) 7310,13800 7260,13750 7260,13710 ; v1(7340,13840) 7320,13840 7310,13850 7200,13850 7190,13840 D2_PD7.1@7190,13800.01 7160.01,13800.01 7156,13796 7156,13788 7156,13470 ; U1_PD7.6@7397.65,13700 7340,13700 7330,13710 7260,13710
NetC4_PD8_1: C4_PD8.1 C5_PD8.1 D2_PD8.1 R8_PD8.1 U1_PD8.6 | length 1228.8
  TopLayer w4: v1(6600,13800) v1(6600,13840)
  BottomLayer w4: R8_PD8.1@6440,13320 6416,13344 6416,13470 ; C4_PD8.1@6460.01,13470 6416,13470 ; C5_PD8.1@6549.99,13580 6530,13600 6530,13620 6520,13630 6520,13710 ; v1(6600,13800) 6570,13800 6520,13750 6520,13710 ; v1(6600,13840) 6580,13840 6570,13850 6460,13850 6450,13840 D2_PD8.1@6450,13800.01 6420.01,13800.01 6416,13796 6416,13788 6416,13470 ; U1_PD8.6@6657.65,13700 6600,13700 6590,13710 6520,13710
NetC4_PD9_1: C4_PD9.1 C5_PD9.1 D2_PD9.1 R8_PD9.1 U1_PD9.6 | length 1228.8
  TopLayer w4: U1_PD9.6@6862.35,14360 6920,14360 6930,14370 7000,14370 ; v1(6920,14460) 6950,14460 7000,14410 7000,14370 ; v1(6920,14500) 6940,14500 6950,14510 7060,14510 7070,14500 D2_PD9.1@7070,14460.01 7099.99,14460.01 7104,14456 7104,14448 7104,14130 ; C5_PD9.1@6970.01,14240 6990,14260 6990,14280 7000,14290 7000,14370 ; C4_PD9.1@7059.99,14130 7104,14130 ; R8_PD9.1@7080,13980 7104,14004 7104,14130
  BottomLayer w4: v1(6920,14460) v1(6920,14500)
NetC4_PD10_1: C4_PD10.1 C5_PD10.1 D2_PD10.1 R8_PD10.1 U1_PD10.6 | length 1228.8
  TopLayer w4: U1_PD10.6@7602.35,14360 7660,14360 7670,14370 7740,14370 ; v1(7660,14460) 7690,14460 7740,14410 7740,14370 ; v1(7660,14500) 7680,14500 7690,14510 7800,14510 7810,14500 D2_PD10.1@7810,14460.01 7839.99,14460.01 7844,14456 7844,14448 7844,14130 ; C5_PD10.1@7710.01,14240 7730,14260 7730,14280 7740,14290 7740,14370 ; C4_PD10.1@7799.99,14130 7844,14130 ; R8_PD10.1@7820,13980 7844,14004 7844,14130
  BottomLayer w4: v1(7660,14460) v1(7660,14500)
NetC4_PD11_1: C4_PD11.1 C5_PD11.1 D2_PD11.1 R8_PD11.1 U1_PD11.6 | length 1228.8
  TopLayer w4: U1_PD11.6@8342.35,14360 8400,14360 8410,14370 8480,14370 ; v1(8400,14460) 8430,14460 8480,14410 8480,14370 ; v1(8400,14500) 8420,14500 8430,14510 8540,14510 8550,14500 D2_PD11.1@8550,14460.01 8579.99,14460.01 8584,14456 8584,14448 8584,14130 ; C5_PD11.1@8450.01,14240 8470,14260 8470,14280 8480,14290 8480,14370 ; C4_PD11.1@8539.99,14130 8584,14130 ; R8_PD11.1@8560,13980 8584,14004 8584,14130
  BottomLayer w4: v1(8400,14460) v1(8400,14500)
NetC4_PD12_1: C4_PD12.1 C5_PD12.1 D2_PD12.1 R8_PD12.1 U1_PD12.6 | length 1228.8
  TopLayer w4: U1_PD12.6@9082.35,14360 9140,14360 9150,14370 9220,14370 ; v1(9140,14460) 9170,14460 9220,14410 9220,14370 ; v1(9140,14500) 9160,14500 9170,14510 9280,14510 9290,14500 D2_PD12.1@9290,14460.01 9319.99,14460.01 9324,14456 9324,14448 9324,14130 ; C5_PD12.1@9190.01,14240 9210,14260 9210,14280 9220,14290 9220,14370 ; C4_PD12.1@9279.99,14130 9324,14130 ; R8_PD12.1@9300,13980 9324,14004 9324,14130
  BottomLayer w4: v1(9140,14460) v1(9140,14500)
NetC4_PD13_1: C4_PD13.1 C5_PD13.1 D2_PD13.1 R8_PD13.1 U1_PD13.6 | length 1228.8
  TopLayer w4: v1(8820,14460) v1(8820,14500)
  BottomLayer w4: R8_PD13.1@8660,13980 8636,14004 8636,14130 ; C4_PD13.1@8680.01,14130 8636,14130 ; C5_PD13.1@8769.99,14240 8750,14260 8750,14280 8740,14290 8740,14370 ; v1(8820,14460) 8790,14460 8740,14410 8740,14370 ; v1(8820,14500) 8800,14500 8790,14510 8680,14510 8670,14500 D2_PD13.1@8670,14460.01 8640.01,14460.01 8636,14456 8636,14448 8636,14130 ; U1_PD13.6@8877.65,14360 8820,14360 8810,14370 8740,14370
NetC4_PD14_1: C4_PD14.1 C5_PD14.1 D2_PD14.1 R8_PD14.1 U1_PD14.6 | length 1228.8
  TopLayer w4: v1(8080,14460) v1(8080,14500)
  BottomLayer w4: R8_PD14.1@7920,13980 7896,14004 7896,14130 ; C4_PD14.1@7940.01,14130 7896,14130 ; C5_PD14.1@8029.99,14240 8010,14260 8010,14280 8000,14290 8000,14370 ; v1(8080,14460) 8050,14460 8000,14410 8000,14370 ; v1(8080,14500) 8060,14500 8050,14510 7940,14510 7930,14500 D2_PD14.1@7930,14460.01 7900.01,14460.01 7896,14456 7896,14448 7896,14130 ; U1_PD14.6@8137.65,14360 8080,14360 8070,14370 8000,14370
NetC4_PD15_1: C4_PD15.1 C5_PD15.1 D2_PD15.1 R8_PD15.1 U1_PD15.6 | length 1228.8
  TopLayer w4: v1(7340,14460) v1(7340,14500)
  BottomLayer w4: R8_PD15.1@7180,13980 7156,14004 7156,14130 ; C4_PD15.1@7200.01,14130 7156,14130 ; C5_PD15.1@7289.99,14240 7270,14260 7270,14280 7260,14290 7260,14370 ; v1(7340,14460) 7310,14460 7260,14410 7260,14370 ; v1(7340,14500) 7320,14500 7310,14510 7200,14510 7190,14500 D2_PD15.1@7190,14460.01 7160.01,14460.01 7156,14456 7156,14448 7156,14130 ; U1_PD15.6@7397.65,14360 7340,14360 7330,14370 7260,14370
NetC4_PD16_1: C4_PD16.1 C5_PD16.1 D2_PD16.1 R8_PD16.1 U1_PD16.6 | length 1228.8
  TopLayer w4: v1(6600,14460) v1(6600,14500)
  BottomLayer w4: R8_PD16.1@6440,13980 6416,14004 6416,14130 ; C4_PD16.1@6460.01,14130 6416,14130 ; C5_PD16.1@6549.99,14240 6530,14260 6530,14280 6520,14290 6520,14370 ; v1(6600,14460) 6570,14460 6520,14410 6520,14370 ; v1(6600,14500) 6580,14500 6570,14510 6460,14510 6450,14500 D2_PD16.1@6450,14460.01 6420.01,14460.01 6416,14456 6416,14448 6416,14130 ; U1_PD16.6@6657.65,14360 6600,14360 6590,14370 6520,14370
NetC4_PD17_1: C4_PD17.1 C5_PD17.1 D2_PD17.1 R8_PD17.1 U1_PD17.6 | length 1228.8
  TopLayer w4: U1_PD17.6@6862.35,15020 6920,15020 6930,15030 7000,15030 ; v1(6920,15120) 6950,15120 7000,15070 7000,15030 ; v1(6920,15160) 6940,15160 6950,15170 7060,15170 7070,15160 D2_PD17.1@7070,15120.01 7099.99,15120.01 7104,15116 7104,15108 7104,14790 ; C5_PD17.1@6970.01,14900 6990,14920 6990,14940 7000,14950 7000,15030 ; C4_PD17.1@7059.99,14790 7104,14790 ; R8_PD17.1@7080,14640 7104,14664 7104,14790
  BottomLayer w4: v1(6920,15120) v1(6920,15160)
NetC4_PD18_1: C4_PD18.1 C5_PD18.1 D2_PD18.1 R8_PD18.1 U1_PD18.6 | length 1228.8
  TopLayer w4: U1_PD18.6@7602.35,15020 7660,15020 7670,15030 7740,15030 ; v1(7660,15120) 7690,15120 7740,15070 7740,15030 ; v1(7660,15160) 7680,15160 7690,15170 7800,15170 7810,15160 D2_PD18.1@7810,15120.01 7839.99,15120.01 7844,15116 7844,15108 7844,14790 ; C5_PD18.1@7710.01,14900 7730,14920 7730,14940 7740,14950 7740,15030 ; C4_PD18.1@7799.99,14790 7844,14790 ; R8_PD18.1@7820,14640 7844,14664 7844,14790
  BottomLayer w4: v1(7660,15120) v1(7660,15160)
NetC4_PD19_1: C4_PD19.1 C5_PD19.1 D2_PD19.1 R8_PD19.1 U1_PD19.6 | length 1228.8
  TopLayer w4: U1_PD19.6@8342.35,15020 8400,15020 8410,15030 8480,15030 ; v1(8400,15120) 8430,15120 8480,15070 8480,15030 ; v1(8400,15160) 8420,15160 8430,15170 8540,15170 8550,15160 D2_PD19.1@8550,15120.01 8579.99,15120.01 8584,15116 8584,15108 8584,14790 ; C5_PD19.1@8450.01,14900 8470,14920 8470,14940 8480,14950 8480,15030 ; C4_PD19.1@8539.99,14790 8584,14790 ; R8_PD19.1@8560,14640 8584,14664 8584,14790
  BottomLayer w4: v1(8400,15120) v1(8400,15160)
NetC4_PD20_1: C4_PD20.1 C5_PD20.1 D2_PD20.1 R8_PD20.1 U1_PD20.6 | length 1228.8
  TopLayer w4: U1_PD20.6@9082.35,15020 9140,15020 9150,15030 9220,15030 ; v1(9140,15120) 9170,15120 9220,15070 9220,15030 ; v1(9140,15160) 9160,15160 9170,15170 9280,15170 9290,15160 D2_PD20.1@9290,15120.01 9319.99,15120.01 9324,15116 9324,15108 9324,14790 ; C5_PD20.1@9190.01,14900 9210,14920 9210,14940 9220,14950 9220,15030 ; C4_PD20.1@9279.99,14790 9324,14790 ; R8_PD20.1@9300,14640 9324,14664 9324,14790
  BottomLayer w4: v1(9140,15120) v1(9140,15160)
NetC4_PD21_1: C4_PD21.1 C5_PD21.1 D2_PD21.1 R8_PD21.1 U1_PD21.6 | length 1228.8
  TopLayer w4: v1(8820,15120) v1(8820,15160)
  BottomLayer w4: R8_PD21.1@8660,14640 8636,14664 8636,14790 ; C4_PD21.1@8680.01,14790 8636,14790 ; C5_PD21.1@8769.99,14900 8750,14920 8750,14940 8740,14950 8740,15030 ; v1(8820,15120) 8790,15120 8740,15070 8740,15030 ; v1(8820,15160) 8800,15160 8790,15170 8680,15170 8670,15160 D2_PD21.1@8670,15120.01 8640.01,15120.01 8636,15116 8636,15108 8636,14790 ; U1_PD21.6@8877.65,15020 8820,15020 8810,15030 8740,15030
NetC4_PD22_1: C4_PD22.1 C5_PD22.1 D2_PD22.1 R8_PD22.1 U1_PD22.6 | length 1228.8
  TopLayer w4: v1(8080,15120) v1(8080,15160)
  BottomLayer w4: R8_PD22.1@7920,14640 7896,14664 7896,14790 ; C4_PD22.1@7940.01,14790 7896,14790 ; C5_PD22.1@8029.99,14900 8010,14920 8010,14940 8000,14950 8000,15030 ; v1(8080,15120) 8050,15120 8000,15070 8000,15030 ; v1(8080,15160) 8060,15160 8050,15170 7940,15170 7930,15160 D2_PD22.1@7930,15120.01 7900.01,15120.01 7896,15116 7896,15108 7896,14790 ; U1_PD22.6@8137.65,15020 8080,15020 8070,15030 8000,15030
NetC4_PD23_1: C4_PD23.1 C5_PD23.1 D2_PD23.1 R8_PD23.1 U1_PD23.6 | length 1228.8
  TopLayer w4: v1(7340,15120) v1(7340,15160)
  BottomLayer w4: R8_PD23.1@7180,14640 7156,14664 7156,14790 ; C4_PD23.1@7200.01,14790 7156,14790 ; C5_PD23.1@7289.99,14900 7270,14920 7270,14940 7260,14950 7260,15030 ; v1(7340,15120) 7310,15120 7260,15070 7260,15030 ; v1(7340,15160) 7320,15160 7310,15170 7200,15170 7190,15160 D2_PD23.1@7190,15120.01 7160.01,15120.01 7156,15116 7156,15108 7156,14790 ; U1_PD23.6@7397.65,15020 7340,15020 7330,15030 7260,15030
NetC4_PD24_1: C4_PD24.1 C5_PD24.1 D2_PD24.1 R8_PD24.1 U1_PD24.6 | length 1228.8
  TopLayer w4: v1(6600,15120) v1(6600,15160)
  BottomLayer w4: R8_PD24.1@6440,14640 6416,14664 6416,14790 ; C4_PD24.1@6460.01,14790 6416,14790 ; C5_PD24.1@6549.99,14900 6530,14920 6530,14940 6520,14950 6520,15030 ; v1(6600,15120) 6570,15120 6520,15070 6520,15030 ; v1(6600,15160) 6580,15160 6570,15170 6460,15170 6450,15160 D2_PD24.1@6450,15120.01 6420.01,15120.01 6416,15116 6416,15108 6416,14790 ; U1_PD24.6@6657.65,15020 6600,15020 6590,15030 6520,15030
NetC4_PD25_1: C4_PD25.1 C5_PD25.1 D2_PD25.1 R8_PD25.1 U1_PD25.6 | length 1228.8
  TopLayer w4: U1_PD25.6@6862.35,15680 6920,15680 6930,15690 7000,15690 ; v1(6920,15780) 6950,15780 7000,15730 7000,15690 ; v1(6920,15820) 6940,15820 6950,15830 7060,15830 7070,15820 D2_PD25.1@7070,15780.01 7099.99,15780.01 7104,15776 7104,15768 7104,15450 ; C5_PD25.1@6970.01,15560 6990,15580 6990,15600 7000,15610 7000,15690 ; C4_PD25.1@7059.99,15450 7104,15450 ; R8_PD25.1@7080,15300 7104,15324 7104,15450
  BottomLayer w4: v1(6920,15780) v1(6920,15820)
NetC4_PD26_1: C4_PD26.1 C5_PD26.1 D2_PD26.1 R8_PD26.1 U1_PD26.6 | length 1228.8
  TopLayer w4: U1_PD26.6@7602.35,15680 7660,15680 7670,15690 7740,15690 ; v1(7660,15780) 7690,15780 7740,15730 7740,15690 ; v1(7660,15820) 7680,15820 7690,15830 7800,15830 7810,15820 D2_PD26.1@7810,15780.01 7839.99,15780.01 7844,15776 7844,15768 7844,15450 ; C5_PD26.1@7710.01,15560 7730,15580 7730,15600 7740,15610 7740,15690 ; C4_PD26.1@7799.99,15450 7844,15450 ; R8_PD26.1@7820,15300 7844,15324 7844,15450
  BottomLayer w4: v1(7660,15780) v1(7660,15820)
NetC4_PD27_1: C4_PD27.1 C5_PD27.1 D2_PD27.1 R8_PD27.1 U1_PD27.6 | length 1228.8
  TopLayer w4: U1_PD27.6@8342.35,15680 8400,15680 8410,15690 8480,15690 ; v1(8400,15780) 8430,15780 8480,15730 8480,15690 ; v1(8400,15820) 8420,15820 8430,15830 8540,15830 8550,15820 D2_PD27.1@8550,15780.01 8579.99,15780.01 8584,15776 8584,15768 8584,15450 ; C5_PD27.1@8450.01,15560 8470,15580 8470,15600 8480,15610 8480,15690 ; C4_PD27.1@8539.99,15450 8584,15450 ; R8_PD27.1@8560,15300 8584,15324 8584,15450
  BottomLayer w4: v1(8400,15780) v1(8400,15820)
NetC4_PD28_1: C4_PD28.1 C5_PD28.1 D2_PD28.1 R8_PD28.1 U1_PD28.6 | length 1228.8
  TopLayer w4: U1_PD28.6@9082.35,15680 9140,15680 9150,15690 9220,15690 ; v1(9140,15780) 9170,15780 9220,15730 9220,15690 ; v1(9140,15820) 9160,15820 9170,15830 9280,15830 9290,15820 D2_PD28.1@9290,15780.01 9319.99,15780.01 9324,15776 9324,15768 9324,15450 ; C5_PD28.1@9190.01,15560 9210,15580 9210,15600 9220,15610 9220,15690 ; C4_PD28.1@9279.99,15450 9324,15450 ; R8_PD28.1@9300,15300 9324,15324 9324,15450
  BottomLayer w4: v1(9140,15780) v1(9140,15820)
NetC4_PD29_1: C4_PD29.1 C5_PD29.1 D2_PD29.1 R8_PD29.1 U1_PD29.6 | length 1228.8
  TopLayer w4: v1(8820,15780) v1(8820,15820)
  BottomLayer w4: R8_PD29.1@8660,15300 8636,15324 8636,15450 ; C4_PD29.1@8680.01,15450 8636,15450 ; C5_PD29.1@8769.99,15560 8750,15580 8750,15600 8740,15610 8740,15690 ; v1(8820,15780) 8790,15780 8740,15730 8740,15690 ; v1(8820,15820) 8800,15820 8790,15830 8680,15830 8670,15820 D2_PD29.1@8670,15780.01 8640.01,15780.01 8636,15776 8636,15768 8636,15450 ; U1_PD29.6@8877.65,15680 8820,15680 8810,15690 8740,15690
NetC4_PD30_1: C4_PD30.1 C5_PD30.1 D2_PD30.1 R8_PD30.1 U1_PD30.6 | length 1228.8
  TopLayer w4: v1(8080,15780) v1(8080,15820)
  BottomLayer w4: R8_PD30.1@7920,15300 7896,15324 7896,15450 ; C4_PD30.1@7940.01,15450 7896,15450 ; C5_PD30.1@8029.99,15560 8010,15580 8010,15600 8000,15610 8000,15690 ; v1(8080,15780) 8050,15780 8000,15730 8000,15690 ; v1(8080,15820) 8060,15820 8050,15830 7940,15830 7930,15820 D2_PD30.1@7930,15780.01 7900.01,15780.01 7896,15776 7896,15768 7896,15450 ; U1_PD30.6@8137.65,15680 8080,15680 8070,15690 8000,15690
NetC4_PD31_1: C4_PD31.1 C5_PD31.1 D2_PD31.1 R8_PD31.1 U1_PD31.6 | length 1228.8
  TopLayer w4: v1(7340,15780) v1(7340,15820)
  BottomLayer w4: R8_PD31.1@7180,15300 7156,15324 7156,15450 ; C4_PD31.1@7200.01,15450 7156,15450 ; C5_PD31.1@7289.99,15560 7270,15580 7270,15600 7260,15610 7260,15690 ; v1(7340,15780) 7310,15780 7260,15730 7260,15690 ; v1(7340,15820) 7320,15820 7310,15830 7200,15830 7190,15820 D2_PD31.1@7190,15780.01 7160.01,15780.01 7156,15776 7156,15768 7156,15450 ; U1_PD31.6@7397.65,15680 7340,15680 7330,15690 7260,15690
NetC4_PD32_1: C4_PD32.1 C5_PD32.1 D2_PD32.1 R8_PD32.1 U1_PD32.6 | length 1228.8
  TopLayer w4: v1(6600,15780) v1(6600,15820)
  BottomLayer w4: R8_PD32.1@6440,15300 6416,15324 6416,15450 ; C4_PD32.1@6460.01,15450 6416,15450 ; C5_PD32.1@6549.99,15560 6530,15580 6530,15600 6520,15610 6520,15690 ; v1(6600,15780) 6570,15780 6520,15730 6520,15690 ; v1(6600,15820) 6580,15820 6570,15830 6460,15830 6450,15820 D2_PD32.1@6450,15780.01 6420.01,15780.01 6416,15776 6416,15768 6416,15450 ; U1_PD32.6@6657.65,15680 6600,15680 6590,15690 6520,15690
NetC5_PD1_2: C5_PD1.2 R8_PD1.2 R88_PD1.1 U1_PD1.9 | length 921.1
  TopLayer w4: U1_PD1.9@6657.63,13700 6715,13700 6735,13680 6933,13680 ; R88_PD1.1@6970,13680 6933,13680 ; C5_PD1.2@7060.01,13580 7025,13580 7020,13575 7020,13430 ; R8_PD1.2@7080,13375 7025,13430 7020,13430 ; 6933,13680 6933,13441 6944,13430 7020,13430
NetC5_PD2_2: C5_PD2.2 R8_PD2.2 R88_PD2.1 U1_PD2.9 | length 921.1
  TopLayer w4: U1_PD2.9@7397.63,13700 7455,13700 7475,13680 7673,13680 ; R88_PD2.1@7710,13680 7673,13680 ; C5_PD2.2@7800.01,13580 7765,13580 7760,13575 7760,13430 ; R8_PD2.2@7820,13375 7765,13430 7760,13430 ; 7673,13680 7673,13441 7684,13430 7760,13430
NetC5_PD3_2: C5_PD3.2 R8_PD3.2 R88_PD3.1 U1_PD3.9 | length 921.1
  TopLayer w4: U1_PD3.9@8137.63,13700 8195,13700 8215,13680 8413,13680 ; R88_PD3.1@8450,13680 8413,13680 ; C5_PD3.2@8540.01,13580 8505,13580 8500,13575 8500,13430 ; R8_PD3.2@8560,13375 8505,13430 8500,13430 ; 8413,13680 8413,13441 8424,13430 8500,13430
NetC5_PD4_2: C5_PD4.2 R8_PD4.2 R88_PD4.1 U1_PD4.9 | length 921.1
  TopLayer w4: U1_PD4.9@8877.63,13700 8935,13700 8955,13680 9153,13680 ; R88_PD4.1@9190,13680 9153,13680 ; C5_PD4.2@9280.01,13580 9245,13580 9240,13575 9240,13430 ; R8_PD4.2@9300,13375 9245,13430 9240,13430 ; 9153,13680 9153,13441 9164,13430 9240,13430
NetC5_PD5_2: C5_PD5.2 R8_PD5.2 R88_PD5.1 U1_PD5.9 | length 921.1
  BottomLayer w4: R8_PD5.2@8660,13375 8715,13430 8720,13430 ; C5_PD5.2@8679.99,13580 8715,13580 8720,13575 8720,13430 ; R88_PD5.1@8770,13680 8807,13680 ; U1_PD5.9@9082.37,13700 9025,13700 9005,13680 8807,13680 ; 8720,13430 8796,13430 8807,13441 8807,13680
NetC5_PD6_2: C5_PD6.2 R8_PD6.2 R88_PD6.1 U1_PD6.9 | length 921.1
  BottomLayer w4: R8_PD6.2@7920,13375 7975,13430 7980,13430 ; C5_PD6.2@7939.99,13580 7975,13580 7980,13575 7980,13430 ; R88_PD6.1@8030,13680 8067,13680 ; U1_PD6.9@8342.37,13700 8285,13700 8265,13680 8067,13680 ; 7980,13430 8056,13430 8067,13441 8067,13680
NetC5_PD7_2: C5_PD7.2 R8_PD7.2 R88_PD7.1 U1_PD7.9 | length 921.1
  BottomLayer w4: R8_PD7.2@7180,13375 7235,13430 7240,13430 ; C5_PD7.2@7199.99,13580 7235,13580 7240,13575 7240,13430 ; R88_PD7.1@7290,13680 7327,13680 ; U1_PD7.9@7602.37,13700 7545,13700 7525,13680 7327,13680 ; 7240,13430 7316,13430 7327,13441 7327,13680